# Altium PCB Nixie_Clock.PcbDoc
Units mil, origin at the board's own origin, x right, y up, seen from the top; angles counter-clockwise.
Board outline 1240.08 x 1320.08 mil, 4 copper layers (Top Layer, Layer 1, Layer 2, Bottom Layer), stack 61.811 mil thick; 34 components, 29 nets, 191 pads, 266 vias.
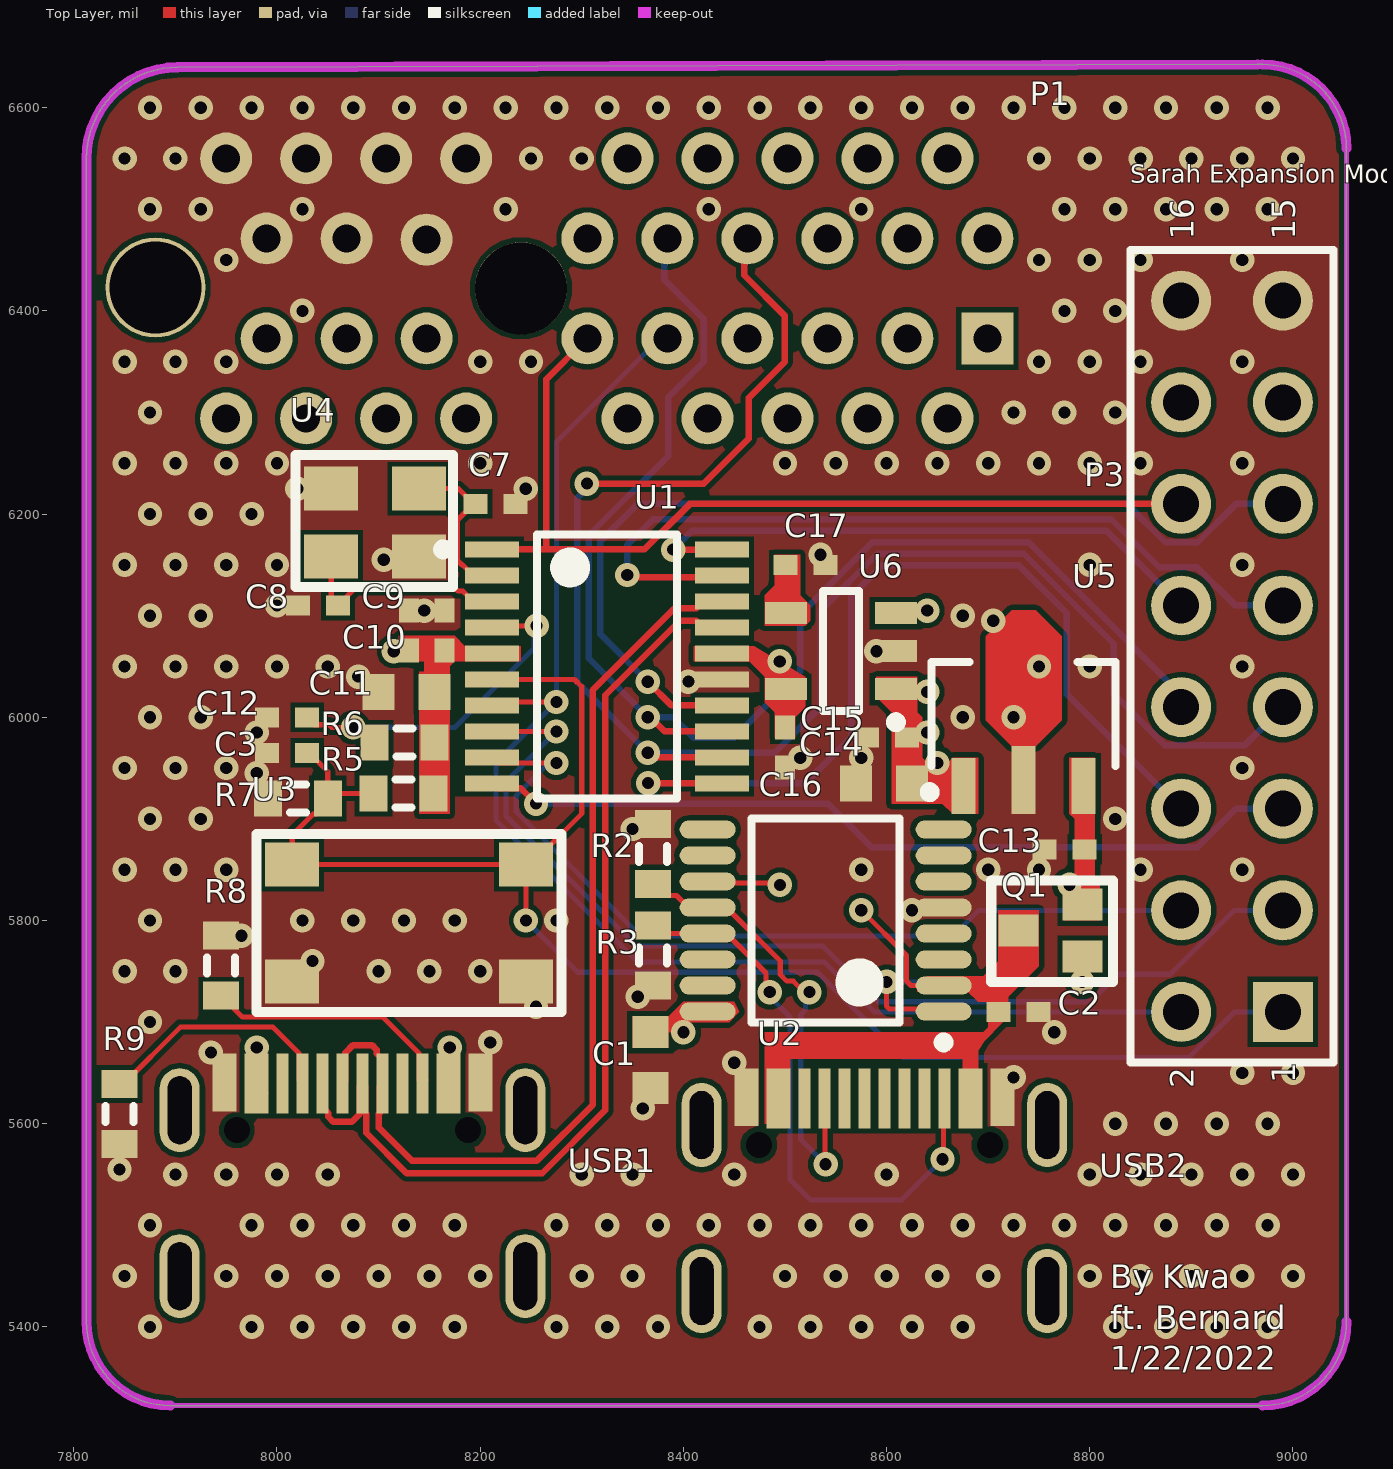
[diagram p0: Top Layer view]
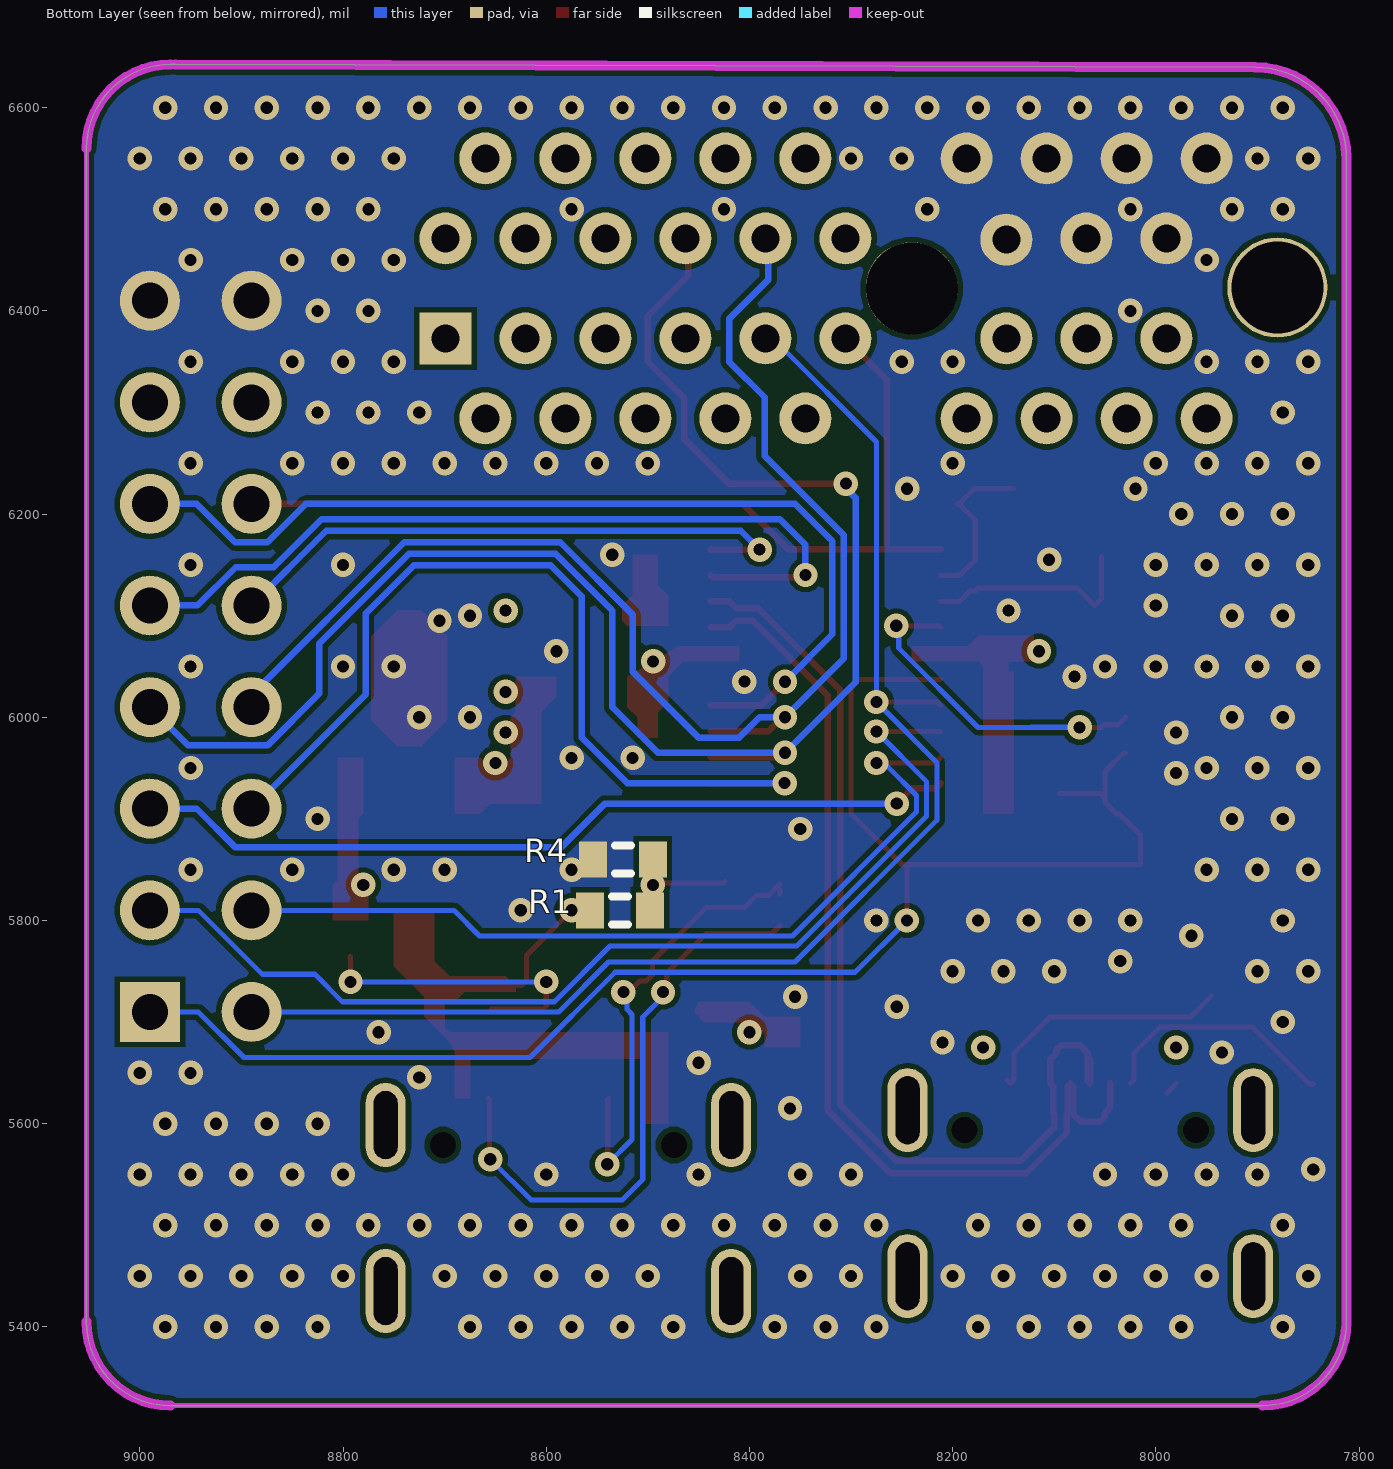
[diagram p1: Bottom Layer view, seen from below]
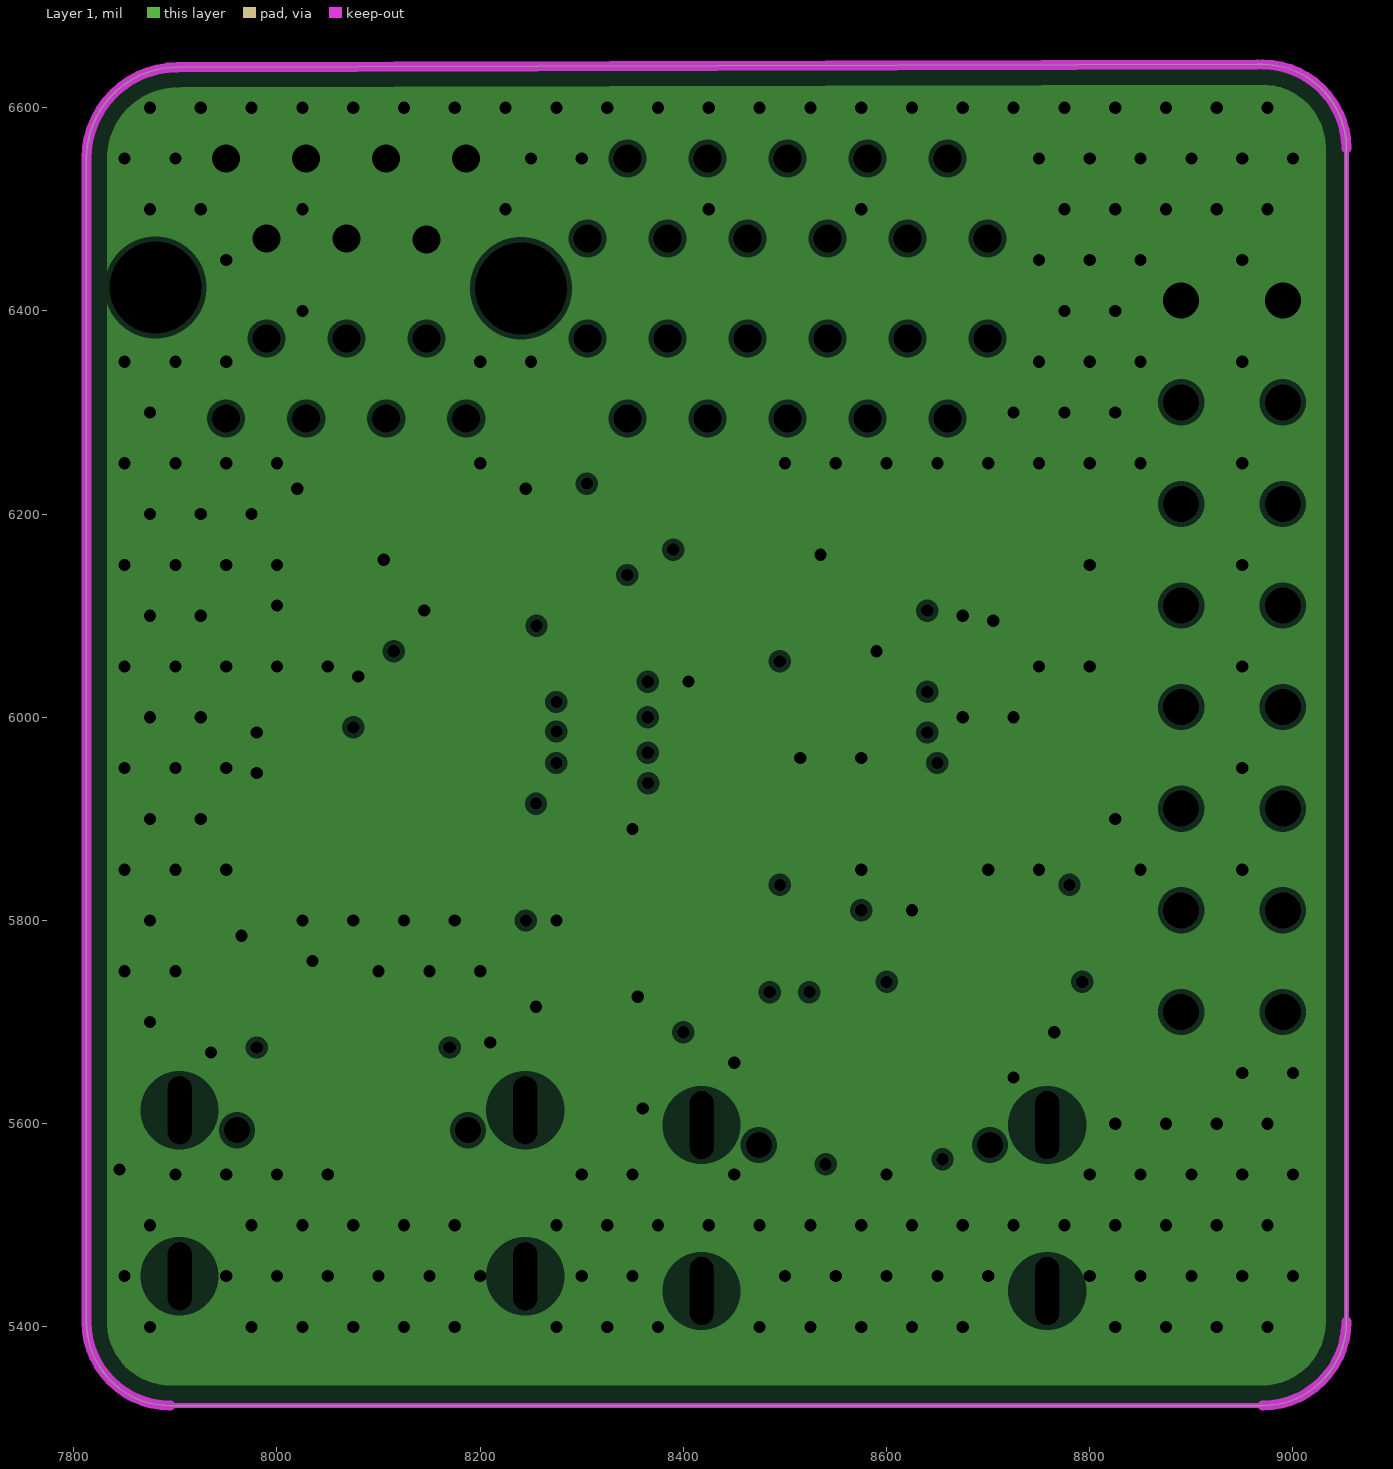
[diagram p2: Layer 1, clearances drawn from the general rule]
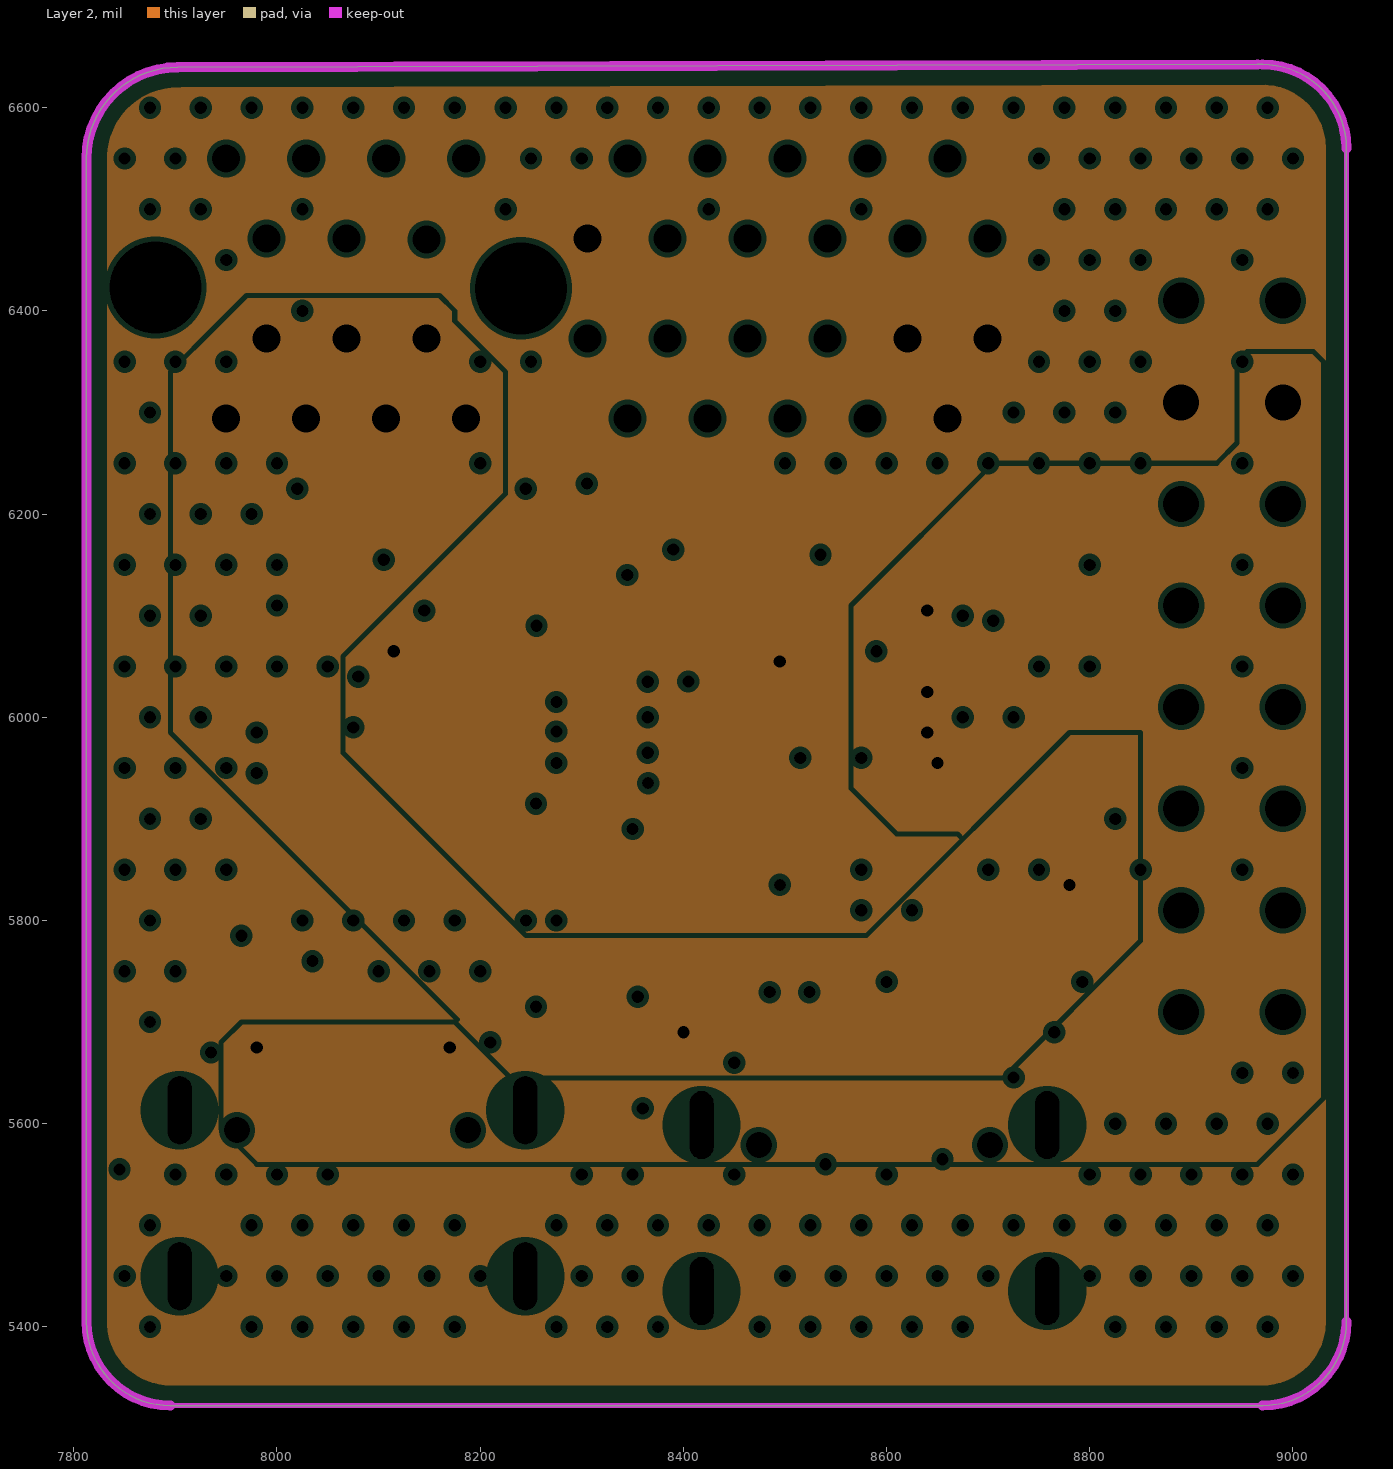
[diagram p3: Layer 2, clearances drawn from the general rule]

## Layer stack, top to bottom
Top Solder: solder mask 0.4, Solder Resist, Dk 3.5
Top Layer: signal copper 1.378
Dielectric 4: prepreg 3.937, PP-006, Dk 4.05
Layer 1: plane copper 0.689, net GND
Dielectric 1: dielectric 49.803, FR-4, Dk 4.8
Layer 2: plane copper 0.689, net 3V3
Dielectric 5: prepreg 3.937, PP-006, Dk 4.05
Bottom Layer: signal copper 1.378
Bottom Solder: solder mask 0.4, Solder Resist, Dk 3.5

## Board outline
7812.46,5405 ccw(c7895,5405) 7895,5322.46 8970,5322.46 ccw(c8970,5405) 9052.54,5405 9052.54,6560 ccw(c8970,6560) 8970,6642.54 8965,6642.54 7902.24,6639.78 ccw(c7902.24,6550) 7812.46,6550

## Design rules (kind name [scope] priority, off if disabled: settings)
Clearance [All] p1: gap=5 ignorepadtopadclearanceinfootprint=FALSE
DiffPairsRouting [All] p1: maxlimit=6 minlimit=6 mostfreqgap=6 toplayer_minwidth=6.4 toplayer_maxwidth=6.4 toplayer_prefwidth=6.4 bottomlayer_minwidth=6.4 bottomlayer_maxwidth=6.4 bottomlayer_prefwidth=6.4 impedanceprofiledriven=TRUE impedanceprofileid={5C14EBB6-B75E-43AF-993B-AA52860A555C} impedanceprofilevalue=90.000000 maxuncoupledlength=500
MinimumSolderMaskSliver [All] p1: minsoldermaskwidth=0
PlaneClearance [All] p1: clearance=5
PlaneConnect [All] p1: planeconnectstyle=Direct reliefexpansion=20 reliefentries=4 reliefconductorwidth=10 reliefairgap=10
PolygonConnect [All] p1: connectstyle=Direct reliefconductorwidth=10 reliefentries=4 polygonreliefangle="90 Angle" airgapwidth=10
RoutingVias [All] p1: holewidth=12 width=24 viastyle="Through Hole" minholewidth=12 minwidth=24 maxholewidth=28 maxwidth=50
SilkToSilkClearance [All] p1: silktosilkclearance=0
SilkToSolderMaskClearance [IsPad] p1: minsilkscreentomaskgap=0 clearancetoexposedcopper=TRUE
SolderMaskExpansion [All] p1: expansion=4 istentingtop=FALSE
Width [All] p1: maxlimit=100 minlimit=5 preferedwidth=5 minimp=50.000000 maximp=50.000000 favimp=50.000000
24 further rules are at their usual default settings.

## Classes and differential pairs
component class Power: C1 C2 C13 C14 C15 C16 C17 Q1 R1 R2 R3 R4 U2 U5 U6 USB2
component class STM32F103C4T6A: C3 C7 C8 C9 C10 C11 C12 P1 P3 R5 R6 R7 R8 R9 U1 U3 U4 USB1
differential pair USB1: +USB1_P -USB1_N

## Components (designator, comment, footprint, x,y, rotation, side; value= is the part's Value field where it differs from the comment)
C1 "Cap Semi" 1608[0603] 8367.5,5662.44 r90 top value=10uF
C2 "Cap Semi" 0402 8730,5710 r180 top value=1uF
C3 "Cap Semi" 0402 8010,5965 r0 top value=100nF
C7 "Cap Semi" 0402 8215.32,6210 r180 top value=10pF
C8 "Cap Semi" 0402 8040.31,6110 r180 top value=10pF
C9 "Cap Semi" 0402 8165,6085.31 r270 top value=100nF
C10 "Cap Semi" 0402 8130,6085.31 r270 top value=100nF
C11 "Cap Semi" 1608[0603] 8127.56,6025 r0 top value=10uF
C12 "Cap Semi" 0402 8010,6000 r0 top value=100nF
C13 "Cap Semi" 0402 8775.31,5870 r0 top value=1uF
C14 "Cap Semi" 1608[0603] 8597.44,5935 r0 top value=10uF
C15 "Cap Semi" 0402 8600.31,5980 r0 top value=1uF
C16 "Cap Semi" 0402 8500,5970.31 r90 top value=1uF
C17 "Cap Semi" 0402 8520.32,6150 r180 top value=10nF
P1 "PCI-e X1" 10018784-10210TLF 8203.31,6386.73 r180 top
P3 "Header 8X2" HDR2X8 8990,5710 r90 top
Q1 "MOSFET-N" BSS214NWH6327 8792.99,5764.41 r90 top
R1 "Res3" J1-0603 8527.38,5810 r0 bottom value=NC
R2 "Res3" J1-0603 8370,5865.47 r270 top value=5.1K
R3 "Res3" J1-0603 8370,5765.47 r90 top value=5.1K
R4 "Res3" J1-0603 8524.53,5860 r180 bottom value=NC
R5 "Res3" J1-0603 8124.53,5925 r0 top value=5k1
R6 "Res3" J1-0603 8125.47,5975 r0 top value=100k
R7 "Res3" J1-0603 8020.47,5920 r0 top
R8 "Res3" J1-0603 7945,5755.47 r270 top value=5k1
R9 "Res3" J1-0603 7845,5609.53 r90 top value=5k1
U1 "STM32F042F4P6" FP-TSSOP20-YA-MFG 8325,6050 r0 top
U2 "Injonic_IP2721" TSOP65P640X120-16N 8540,5800 r180 top
U3 "TSC015" TSC015 8100,5760 r0 top
U4 "S3232000121040" SMD3225 8053.39,6158.07 r0 top
U5 "UR133AG-50-AB3-B-R" SOT89-150P415X160-3N 8735,6005 r90 top
U6 "BROADCHIP BCT2019EUKV33-TR" SOT95P290X115-5N 8555,6065 r180 top
USB1 "USB C Receptacle_2.0" TYPE-C16PIN-CONNECTOR 8074.29,5531.53 r0 top
USB2 "USB C Receptacle_2.0" TYPE-C16PIN-CONNECTOR 8588.01,5516.93 r0 top

## Footprints (in the part's own frame and the unit in brackets; to place one, negate y for a bottom-side part, rotate by r counter-clockwise, add the part's x,y. Pads: shape width x height; smd on the part's side, far side on the other; paste and mask are expansions set on the pad)
0402 [mm] "Chip Capacitor, Body 1.0x0.5mm, IPC High Density"
  rect 0.6x0.5 smd: 1(-0.5,0) 2(0.5,0)
  body extent -0.55,-0.3 0.55,0.3, height 1.3
1608[0603] [mm] "Chip Capacitor, Body 1.6x0.8mm, IPC High Density"
  rect 0.8x0.9 smd: 1(-0.7,0) 2(0.7,0)
  body extent -0.87,-0.48 0.87,0.48, height 1.3
10018784-10210TLF [mm] "36 Position Female Connector PCI Express™ Gold 0.039\" (1.00mm) Black"
  rect 1.3x1.3 hole 0.7: A1(-12.595,0.353)
  round 1.3 hole 0.7: A2(-11.599,2.353) A3(-10.595,0.353) A4(-9.599,2.353) A5(-8.595,0.353) A6(-7.599,2.353) A7(-6.595,0.353) A8(-5.599,2.353) A9(-4.595,0.353) A10(-3.599,2.353) A11(-2.595,0.353) A12(0.434,2.353) A13(1.425,0.353) A14(2.434,2.353) A15(3.425,0.353) A16(4.434,2.353) A17(5.425,0.353) A18(6.434,2.353) B1(-12.595,-2.147) B2(-11.599,-4.147) B3(-10.595,-2.147) B4(-9.599,-4.147) B5(-8.595,-2.147) B6(-7.599,-4.147) B7(-6.595,-2.147) B8(-5.599,-4.147) B9(-4.595,-2.147) B10(-3.599,-4.147) B11(-2.595,-2.147) B12(0.434,-4.147) B13(1.425,-2.118) B14(2.434,-4.147) B15(3.425,-2.147) B16(4.434,-4.147) B17(5.425,-2.147) B18(6.434,-4.147)
  round 2.3 hole 2.3: ""(-0.938,-0.902)
  round 2.5 hole 2.3: ""(8.201,-0.921)
  body extent -15.58,-6 9.42,2.8, height 11
BSS214NWH6327 [mm]
  rect 0.8x1 smd: 1(0,0) 2(1.3,0) 3(0.65,1.6)
  silkscreen extent -0.64,-0.76 1.91,2.29
FP-TSSOP20-YA-MFG [mm]
  rect 1.35x0.4 smd paste+0 mask+0: 1(-2.875,2.925) 2(-2.875,2.275) 3(-2.875,1.625) 4(-2.875,0.975) 5(-2.875,0.325) 6(-2.875,-0.325) 7(-2.875,-0.975) 8(-2.875,-1.625) 9(-2.875,-2.275) 10(-2.875,-2.925) 11(2.875,-2.925) 12(2.875,-2.275) 13(2.875,-1.625) 14(2.875,-0.975) 15(2.875,-0.325) 16(2.875,0.325) 17(2.875,0.975) 18(2.875,1.625) 19(2.875,2.275) 20(2.875,2.925)
  silkscreen extent -4.22,-3.3 1.75,3.3, body extent -3.65,-3.55 3.65,3.55, height 0.25
HDR2X8 [mm] "Connector; Header; 8x2 Position"
  rect 1.5x1.5 hole 0.9: 1(0,0)
  round 1.5 hole 0.9: 2(0,2.54) 3(2.54,0) 4(2.54,2.54) 5(5.08,0) 6(5.08,2.54) 7(7.62,0) 8(7.62,2.54) 9(10.16,0) 10(10.16,2.54) 11(12.7,0) 12(12.7,2.54) 13(15.24,0) 14(15.24,2.54) 15(17.78,0) 16(17.78,2.54)
  silkscreen extent -1.27,-1.27 19.05,3.81
J1-0603 [mm] "Chip Resistor, Body 1.6x0.8mm, IPC High Density"
  rect 0.7x0.9 smd: 1(-0.75,0) 2(0.75,0)
  silkscreen extent -0.2,-0.35 0.2,0.35, body extent -0.85,-0.48 0.85,0.48, height 0.9
SMD3225 [mm] "32 MHz SMD Crystal Resonator"
  rect 1.35x1.1 smd: 1(0,0) 2(2.2,0) 3(2.2,1.7) 4(0,1.7)
  silkscreen extent -0.89,-0.76 3.05,2.54, body extent -0.46,-0.36 2.74,2.14, height 0.81
SOT89-150P415X160-3N [mm] "SOT89, 3-Leads, Body 4.50x2.45mm, Pitch 1.50mm, Lead Span 4.2mm, IPC Medium Density"
  rect 1.4x0.6 smd: 1(-1.85,1.5) 3(-1.85,-1.5)
  rect 1.7x0.6 smd: 2(-1.7,0)
  Top Layer region: -0.85,0.3 -0.2,0.95 1.9,0.95 2.55,0.3 2.55,-0.3 1.9,-0.95 -0.2,-0.95 -0.85,-0.3
  silkscreen extent -2.12,-2.3 1.25,2.47, body extent -2.2,-2.3 1.99,2.3, height 1.6
SOT95P290X115-5N [mm] "SOT23, 5-Leads, Body 2.92x2.90mm, Pitch 0.95mm, IPC Medium Density"
  rect 1.05x0.55 smd: 1(-1.375,0.95) 2(-1.375,0) 3(-1.375,-0.95) 4(1.375,-0.95) 5(1.375,0.95)
  silkscreen extent -1.5,-1.5 0.45,1.9, body extent -1.53,-1.51 1.53,1.51, height 1.15
TSC015 [mil] "Tactile Switch"
  rect 53.15x43.31 smd: 1(-85,95) 1(145,95) 2(-85,-20) 2(145,-20)
  silkscreen extent -120,-50 180,125
TSOP65P640X120-16N [mm] "TSOP, 16-Leads, Body 4.96x4.40mm, Pitch 0.65mm, IPC Medium Density"
  oval 1.4x0.45 smd: 1(-2.95,2.275) 2(-2.95,1.625) 3(-2.95,0.975) 4(-2.95,0.325) 5(-2.95,-0.325) 6(-2.95,-0.975) 7(-2.95,-1.625) 8(-2.95,-2.275) 9(2.95,-2.275) 10(2.95,-1.625) 11(2.95,-0.975) 12(2.95,-0.325) 13(2.95,0.325) 14(2.95,0.975) 15(2.95,1.625) 16(2.95,2.275)
  silkscreen extent -3.08,-2.55 1.85,3.17, body extent -3.2,-2.55 3.2,2.55, height 1.2
TYPE-C16PIN-CONNECTOR [mm]
  rect 0.6x1.449 smd paste+0: A1-B12(-3.2,2.77) B1-A12(3.2,2.77)
  rect 0.6x1.5 smd paste+0: A4-B9(-2.4,2.745) B4-A9(2.4,2.745)
  rect 0.3x1.5 smd paste+0: A5(-1.25,2.745) A6(-0.25,2.745) A7(0.25,2.745) A8(-1.75,2.745) B5(1.75,2.745) B6(0.75,2.745) B7(-0.75,2.745) B8(1.25,2.745)
  oval 1x2.1 hole 0.6 slot 1.7 at 90 deg paste+0: MH(-4.32,-2.075) MH(-4.32,2.075) MH(4.32,-2.075) MH(4.32,2.075)
  rect 0x0 hole 0.65 paste+0: MH(-2.89,1.575) MH(2.89,1.575)
  body extent -6.1,-65.71 6.1,2.98, height 4.7

## Part data
C1 C2 C3 C7 C8 C9 C10 C11 C12 C13 C14 C15 C16 C17: "Capacitor (Semiconductor SIM Model)", LatestRevisionDate=29-May-2009, LatestRevisionNote="IPC-7351 Footprint Added.", PackageDescription="Chip Capacitor", PackageReference=C1206, Published=8-Jun-2000, Publisher="Altium Limited"
  C11: Supplier 1=Digi-Key
P3: "Header, 8-Pin, Dual row", LatestRevisionDate=17-Jul-2002, LatestRevisionNote="Re-released for DXP Platform.", Publisher="Altium Limited"
Q1: "N-Channel MOSFET", LatestRevisionDate=17-Jul-2002, LatestRevisionNote="Re-released for DXP Platform.", PackageDescription="TO, Flat Index; 3 In-Line, Axial Leads; Body Dia. 4.6mm; Lead Dia. 0.5 mm (max)", PackageReference=E3, PackageVersion=1995/1996, Published=8-Jun-2000, Publisher="Altium Limited"
R1 R2 R3 R4 R5 R6 R8 R9: "Resistor", LatestRevisionDate=29-May-2009, LatestRevisionNote="IPC-7351 Footprint Added.", PackageDescription="Chip Resistor", PackageReference=J1-0603, Published=8-Jun-2000, Publisher="Altium Limited"
R7: library part CMP-2000-07406-1, "Photoconductive Resistor, 200 kOhm, 100 V, 80 mW, -40 to 75 degC, 2-Pin THD, RoHS", Dark Resistance=200kohm, Manufacturer="Excelitas Technology", Operating Temperature Max=75°C, Operating Temperature Min=-40°C, Package Description="2-Pin Through Hole Device, Body Width 4.17 mm (Max), Height 2.29 mm", Package Reference=VT90N1, Power Rating=80mW, Resistance @ Lux=12kohm, Resistor Case Style=-, Voltage Rating=100V, Datasheet URL=http://datasheet.octopart.com/VT90N1-Excelitas-datasheet-10388451.pdf, Datasheet Version=09/2006, Manufacturer URL=http://www.excelitas.com/Pages/Index.aspx, Mounting Technology=ThroughHole, Packaging=Each, Product Range=-, SVHC=Cadmiumchloride(15-Jun-2015)
U1: library part CMP-0304-00106-3, "IC MCU 32BIT 16KB FLASH 20TSSOP", Ambient Temperature Range High=+85°C, Ambient Temperature Range Low=-40°C, Frequency=48MHz, Manufacturer=STMicroelectronics, Max Junction Temp=+105°C, Max Supply Voltage=3.6V, Min Supply Voltage=2V, Nominal Supply Current=0.4-20.5mA, Package=TSSOP20-YA, Temperature="-40°C to +85°C", Automotive=No, Category=IC, ComponentLink2Description=Datasheet, ComponentLink2URL=https://www.st.com/resource/en/datasheet/stm32f042f4.pdf, Core Architecture="ARM Cortex-M0", Data Bus Width=32bits, Device Class L1="Integrated Circuits (ICs)", Device Class L2="Embedded Processors and Controllers", Device Class L3=Microcontrollers, Digikey Description="IC MCU 32BIT 16KB FLASH 20TSSOP", Height=1.2mm, Interface=I2C,SPI,UART,USART,CAN,USB,I2S,Other, Ipc Land Pattern Name=SOP65P640X120-20, Lead Free=Yes, Manufacturer Part Number=STM32F042F4P6, Memory Size=16KBytes, Memory Type=FLASH, Mouser Description="MCU 32-Bit STM32F ARM Cortex M0 RISC 16KB Flash 2.5V/3.3V 20-Pin TSSOP Tube", Number Of A/D Converters=1, Number Of Adc Channels=12, Number Of Cores=1, Number Of I2C Channels=1, Number Of I/Os=16, Number Of Pwm Channels=6, Number Of Spi Channels=1, Number Of Timers/Counters=6, Number Of Uart Channels=2, Number Of Usb Channels=1, Octopart=https://octopart.com/stm32f042f4p6-stmicroelectronics-34084829, Ram Size=6KBytes, RoHS=TRUE, Standoff Height=0.05mm, Temperature Range High=+85°C, Temperature Range Low=-40°C
U2: library part Injonic_P2721, "USB-C Controller"
U3: "Tactile Switch"
U4: "32MHz SMD Crystal Resonator"
U5: library part "UR133AG-50-AB3-B-R SOT-89", "12V-5V Voltage Regulator"
U6: library part BCT2019EUKV33-TR, "5V-3.3V Voltage Regulator"

## Via types
v1: diameter 24, hole 12, Top Layer to Bottom Layer, tented both sides, 205 vias
v2: diameter 24, hole 12, Top Layer to Bottom Layer, 61 vias

## Nets (pads, with @x,y where several pads share a name; then routed paths per layer and width w, separated by ;. In a path a pad name is that pad's centre, name@x,y a point inside that pad or via, vN(x,y) a via of type N, cw(c..) or ccw(c..) an arc to the next point about the centre after c; other vN are vias at no path point)
3V3: C9.2 C10.2 C11.2 C16.2 P1.A1 P1.A2 P1.A3 P1.B11 P3.14 R5.2 R6.2 U1.5 U1.16 U6.5
  other v2: 8494.8,6055 8115,6065
5V: C14.2 C15.2 P3.13 U5.1 U6.1 U6.3 USB1.A4-B9 USB1.B4-A9 | length 13.2
  Top Layer w5: USB1.A4-B9 USB1.A4-B9@7989.11,5630.29
  other v2: 7980,5675 8170,5675 8650,5955 8640,5985 8640,6025 8640,6105
12V: C1.2 C13.2 P1.A12 P1.A13 P1.A14 P1.A15 P1.A16 P1.A17 P1.A18 Q1.2 U2.16 U5.3
  other v2: 8400,5690 8780,5835
ADC: C3.2 P3.1 R5.1 R7.2 U1.6 U3.1 | length 1579.3
  Top Layer w5: C3.2 8031.65,5965 8050,5946.65 R7.2 ; R5.1 8055,5925 R7.2 ; U1.6 8292.8,6037.2 8300,6030 8300,5905.08 8249.92,5855 U3.1@8245,5855 ; v2(8245,5800) U3.1@8245,5855 ; R7.2 8050,5916.06 8038.72,5904.78 8035.63,5904.78 8015,5884.15 8015,5855 U3.1@8245,5855
  Bottom Layer w5: v2(8245,5800) 8296,5749 8532.08,5749 8616.08,5665 8897.36,5665 8942.36,5710 P3.1
CC1: R2.2 U2.12 USB2.A5 | length 458.5
  Top Layer w5: R2.2@8370,5826.06 R2.2@8370,5830 ; R2.2 8381.28,5824.67 8393.29,5824.67 8405.16,5812.8 U2.12 8442.56,5812.8 8495.35,5760 8495.35,5746.72 8501.87,5740.21 8508.15,5740.21 8518.86,5729.5 v2(8524,5729.5) ; USB2.A5 8539.4,5624.4 8539.4,5560.6 v2(8540,5560)
  Bottom Layer w5: v2(8524,5729.5) 8520.36,5725.86 8520.36,5712.36 8515.5,5707.5 8515.5,5584.5 v2(8540,5560)
CC2: R3.2 U2.13 USB2.B5 | length 579.5
  Top Layer w5: R3.2 8377.8,5787.2 U2.13 8442.56,5787.2 8481.36,5748.4 8481.36,5733.14 v2(8485,5729.5) ; v2(8655,5565) 8655.95,5565.95 8655.95,5624.05 USB2.B5
  Bottom Layer w5: v2(8485,5729.5) 8485,5725 8505,5705 8505,5545 8525,5525 8615,5525 v2(8655,5565)
DOT_PWM: P1.B9 P3.8 U1.13 | length 1354.3
  Top Layer w6.4: v2(8365,6000) 8367.59,6000 8381.56,5986.02 U1.13
  Bottom Layer w6.4: P1.B9@8381.26,6468.43 8381.26,6430.84 8420,6392.1 8420,6350 8385,6315 8385,6257.08 8306.97,6179.05 8306.97,6058.03 v2(8365,6000) 8390,6000 8410,5980 8450,5980 8515,6045 8515,6101.12 8586.09,6172.21 8739.78,6172.21 8890,6021.98 P3.8
GND: C1.1 C2.1 C3.1 C7.1 C8.2 C9.1 C10.1 C11.1 C12.1 C13.1 C14.1 C15.1 C16.1 C17.1 P1.B12 P1.B13 P1.B14 P1.B15 P1.B16 P1.B17 P1.B18 P3.15 P3.16 R2.1 R3.1 R4.1 R7.1 R8.1 R9.1 U1.15 U2.5 U3.2 U4.2 U4.4 U5.2 U6.2 USB1.A1-B12 USB1.B1-A12 USB2.A1-B12 USB2.B1-A12
  other v1: 7875,5400 7975,5400 8025,5400 8075,5400 8125,5400 8175,5400 8275,5400 8325,5400 8375,5400 8475,5400 8525,5400 8575,5400 8625,5400 8675,5400 8825,5400 8875,5400 8925,5400 8975,5400 7850,5450 7950,5450 8000,5450 8050,5450 8100,5450 8150,5450 8200,5450 8300,5450 8350,5450 8500,5450 8550,5450 8600,5450 8650,5450 8700,5450 8800,5450 8850,5450 8900,5450 8950,5450 9000,5450 7875,5500 7975,5500 8025,5500 8075,5500 8125,5500 8175,5500 8275,5500 8325,5500 8375,5500 8425,5500 8475,5500 8525,5500 8575,5500 8625,5500 8675,5500 8725,5500 8775,5500 8825,5500 8875,5500 8925,5500 8975,5500 7900,5550 7950,5550 8000,5550 8050,5550 8300,5550 8350,5550 8450,5550 8600,5550 8800,5550 8850,5550 8900,5550 8950,5550 9000,5550 8825,5600 8875,5600 8925,5600 8975,5600 8950,5650 9000,5650 7875,5700 7850,5750 7900,5750 8100,5750 8150,5750 8200,5750 7875,5800 8025,5800 8075,5800 8125,5800 8175,5800 8275,5800 7850,5850 7900,5850 7950,5850 8700,5850 8850,5850 8950,5850 7875,5900 7925,5900 8825,5900 7850,5950 7900,5950 7950,5950 8950,5950 7875,6000 7925,6000 8675,6000 8725,6000 7850,6050 7900,6050 7950,6050 8000,6050 8050,6050 8750,6050 8800,6050 8950,6050 7875,6100 7925,6100 8675,6100 7850,6150 7900,6150 7950,6150 8000,6150 8800,6150 8950,6150 7875,6200 7925,6200 7975,6200 7850,6250 7900,6250 7950,6250 8000,6250 8200,6250 8500,6250 8550,6250 8600,6250 8650,6250 8700,6250 8750,6250 8800,6250 8850,6250 8950,6250 7875,6300 8725,6300 8775,6300 8825,6300 7850,6350 7900,6350 7950,6350 8200,6350 8250,6350 8750,6350 8800,6350 8850,6350 8950,6350 8025,6400 8775,6400 8825,6400 7950,6450 8750,6450 8800,6450 8850,6450 8950,6450 7875,6500 7925,6500 8025,6500 8225,6500 8425,6500 8575,6500 8775,6500 8825,6500 8875,6500 8925,6500 8975,6500 7850,6550 7900,6550 8250,6550 8300,6550 8750,6550 8800,6550 8850,6550 8900,6550 8950,6550 9000,6550 7875,6600 7925,6600 7975,6600 8025,6600 8075,6600 8125,6600 8175,6600 8225,6600 8275,6600 8325,6600 8375,6600 8425,6600 8475,6600 8525,6600 8575,6600 8625,6600 8675,6600 8725,6600 8775,6600 8825,6600 8875,6600 8925,6600 8975,6600
  other v2: 7845,5555 8360,5615 8725,5645.5 8450,5660 7935,5670 8210,5680 8765,5690 8255,5715 8355,5725 8035,5760 7965,5785 8625,5810 8575,5850 8750,5850 8350,5890 7980,5945 8515,5960 8575,5960 7980,5985 8404.95,6035.13 8080,6040 8590,6065 8705,6095 8145,6105 8000,6110 8105,6155 8535,6160 8020,6225 8244.8,6225
HV5222_PWM: P1.B7 P3.7 U1.12 | length 1660.2
  Top Layer w6.4: v2(8305,6230) 8420,6230 8464.29,6274.29 8464.29,6314.29 8500,6350 8500,6395 8460,6435 P1.B7@8460,6468.43 ; v2(8365,5965) 8369.57,5960.43 U1.12
  Bottom Layer w6.4: v2(8305,6230) 8305,6225.24 8295.57,6215.81 8295.57,6034.43 v2(8365,5965) 8490,5965 8535,6010 8535,6105 8590.81,6160.81 8735.06,6160.81 8823.59,6072.27 8823.59,6023.05 8874.37,5972.27 8952.27,5972.27 P3.7
LED_CLK: P3.11 U1.14 | length 958.6
  Top Layer w6.4: v2(8365,6035) 8388.39,6011.61 U1.14
  Bottom Layer w6.4: v2(8365,6035) 8318.37,6081.63 8318.37,6173.37 8355,6210 8836.65,6210 8874.37,6172.27 8906.2,6172.27 8943.92,6210 P3.11
LED_MOSI: P3.6 U1.11 | length 913.6
  Top Layer w6.4: v2(8365.33,5935.2) 8365.69,5934.84 U1.11
  Bottom Layer w6.4: v2(8365.33,5935.2) 8520.2,5935.2 8565,5980 8565,6118.88 8595.53,6149.41 8730.34,6149.41 8777.48,6102.27 8777.48,6022.52 P3.6
NetC17_2: C17.2 U6.4
NetR1_1: R1.1 R4.2 U2.11 | length 72.5
  Top Layer w5: U2.11 8425.55,5836.69 8493.31,5836.69 v2(8495,5835)
NetR8_2: R8.2 USB1.B5 | length 254.2
  Top Layer w5: R8.2 7965.94,5705 8104.14,5705 8139.78,5669.36 8139.78,5643.01 USB1.B5 USB1.B5@8146.59,5643.01
NetR9_2: R9.2 USB1.A5 | length 241.6
  Top Layer w5: R9.2 7848.94,5639.06 7904.88,5695 7996.03,5695 8021.67,5669.36 8021.67,5643.01 USB1.A5
Nixie_MOSI: P1.A9 P3.2 U1.7 | length 1361.5
  Top Layer w5: U1.7 8215.2,6015 v2(8275,6015)
  Bottom Layer w5: P1.A9@8381.26,6370 8373.99,6370 8275,6271.01 v2(8275,6015) 8215.5,5955.5 8215.5,5898.64 8355.14,5759 8538.78,5759 8587.78,5710 P3.2
Nixie_SCK: P1.A11 P3.12 U1.1 | length 917.1
  Top Layer w6.4: U1.1 8265,6165.16 ; P1.A11@8302.52,6370 8265,6332.48 8265,6165.16 ; P3.12 8406.44,6210 8361.59,6165.16 8265,6165.16
NRST: C12.2 R6.1 U1.4 | length 327.3
  Top Layer w5: C12.2 8037.03,5992.66 8051.28,5992.66 8053.94,5990 v2(8075,5990) ; U1.4 8213.43,6090 v2(8255.5,6090)
  Bottom Layer w5: v2(8075,5990) 8075.14,5990.14 8122.86,5990.14 8123,5990.28 ; 8123,5990 8175,5990 8253,6068 8253,6087.5 v2(8255.5,6090)
OSCIN: C7.2 U1.2 U4.3 | length 164.4
  Top Layer w5: U4.3 8178.66,6225 C7.2@8193.66,6210 ; C7.2 C7.2@8193.66,6210 ; U1.2 8193.11,6139.57 8182.89,6149.78 8182.13,6149.78 8177.74,6154.18 8177.74,6194.07 C7.2@8193.66,6210
OSCOUT: C8.1 U1.3 U4.1 | length 215.3
  Top Layer w5: U4.1 8053.39,6116.61 C8.1 8077.34,6127.34 8174.92,6127.34 8178.07,6124.19 8182.89,6124.19 8193.11,6113.98 U1.3
Piezo_PWM: P3.5 U1.10 | length 819.7
  Top Layer w6.4: U1.10 8216.49,5930.17 8239.83,5930.17 v2(8255,5915)
  Bottom Layer w6.4: v2(8255,5915) 8542.15,5915 8584.87,5872.27 8906.2,5872.27 8943.92,5910 P3.5
SWCLK: P3.10 U1.20 | length 586.4
  Top Layer w6.4: v2(8390,6165) 8390.08,6165.08 8438.11,6165.08 U1.20
  Bottom Layer w6.4: v2(8390,6165) 8408.6,6183.6 8816.4,6183.6 P3.10
SWIO: P3.9 U1.19 | length 815.5
  Top Layer w6.4: v2(8344.8,6140) 8346.78,6138.02 8436.64,6138.02 U1.19
  Bottom Layer w6.4: v2(8344.8,6140) 8345,6140.2 8345,6170 8370,6195 8821.12,6195 8868.39,6147.73 8905.63,6147.73 8943.35,6110 P3.9
USART_RX: P3.4 U1.9 | length 849.9
  Top Layer w5: U1.9 8217.18,5955.06 8274.94,5955.06 v2(8275,5955)
  Bottom Layer w5: v2(8275,5955) 8271.36,5951.36 8263.79,5951.36 8235.5,5923.08 8235.5,5906.92 8357.64,5784.78 8665.56,5784.78 8690.78,5810 P3.4
USART_TX: P3.3 U1.8 | length 1044.4
  Top Layer w5: U1.8 v2(8275,5986)
  Bottom Layer w5: v2(8275,5986) 8225.5,5936.5 8225.5,5902.78 8353.5,5774.78 8537.14,5774.78 8591.92,5720 8800.66,5720 8827.69,5747.03 8879.39,5747.03 8942.36,5810 P3.3
USB1_N: U1.17 USB1.A7 USB1.B7 | length 986.7
  Top Layer w6.4: USB1.B7 8044.76,5615.98 8050.34,5610.4 8050.34,5606.68 8055.14,5601.87 8073.75,5601.87 8081.42,5609.55 8081.42,5636.89 USB1.A7 8086.84,5636.89 8086.84,5610.46 8087.77,5609.52 8087.77,5591.08 8127.57,5551.29 8261.05,5551.29 8323.1,5613.33 8323.1,6021.66 8396.42,6094.98 8412.89,6094.98 8419.49,6088.39 U1.17
USB1_P: U1.18 USB1.A6 USB1.B6 | length 989.8
  Top Layer w6.4: USB1.A6@8064.45,5663.22 USB1.A6 8067.15,5642.31 8067.15,5669.65 8074.83,5677.33 8093.43,5677.33 8098.23,5672.52 8098.23,5668.8 8103.82,5663.22 USB1.B6 8101.11,5636.89 8101.11,5610.46 8100.17,5609.52 8100.17,5596.22 8132.7,5563.68 8255.92,5563.68 8310.7,5618.47 8310.7,6026.8 8391.28,6107.38 8412.89,6107.38 8419.49,6113.98 U1.18
VBUS: C2.2 Q1.3 R1.2 U2.2 USB2.A4-B9 USB2.B4-A9 | length 126.4
  Top Layer w5: v2(8575,5810) 8619.5,5765.5 8619.5,5740.5 8623.98,5736.02 U2.2
VBUS_GATE: Q1.1 U2.1 | length 299.8
  Top Layer w5: v2(8600,5739.5) 8600,5715.65 8602.93,5712.72 8653.86,5712.72 U2.1 ; v2(8792.58,5739.5) 8792.58,5764 Q1.1
  Bottom Layer w5: v2(8600,5739.5) v2(8792.58,5739.5)
pads on no net: P1. P1.A4 P1.A5 P1.A6 P1.A7 P1.A8 P1.A10 P1.B1 P1.B2 P1.B3 P1.B4 P1.B5 P1.B6 P1.B8 P1.B10 U2.3 U2.4 U2.6 U2.7 U2.8 U2.9 U2.10 U2.14 U2.15 USB1.A8 USB1.B8 USB1.MH USB2.A6 USB2.A7 USB2.A8 USB2.B6 USB2.B7 USB2.B8 USB2.MH

## Polygon pours and split planes (outlines as drawn)
GND on Top Layer "GND_L01_P002" (solid, remove dead copper, pour order 2): 7812.16,6633.24 7812.16,5298.24 9087.16,5298.24 9087.16,6633.24
no net on Top Layer "NONET_L01_P000" (solid, pour order 0): 4660,2880 4690,2850 4690,1685 6970,1685 7015,1640 7035,1660 7035,2890 4650,2890 4640,2880
GND on Bottom Layer "GND_L04_P001" (solid, remove dead copper, pour order 1): 7815,6635 7815,5300 9090,5300 9090,6635
12V on Layer 2 (split plane): 8172.45,6398.94 8172.45,6390 8172.65,6389.02 8173.2,6388.2 8198.2,6363.2 8222.45,6338.94 8222.45,6221.06 8161.95,6160.55 8063.2,6061.8 8062.65,6060.98 8062.45,6060 8062.45,5965 8062.65,5964.02 8063.2,5963.2 8098.2,5928.2 8243.2,5783.2 8244.02,5782.65 8245,5782.45 8580,5782.45 8580.98,5782.65 8581.8,5783.2 8771.8,5973.2 8781.06,5982.45 8847.45,5982.45 8847.45,5781.06 8713.94,5647.55 8231.06,5647.55 8178.46,5700.14 8178.48,5700.15 8179.3,5700.7 8179.85,5701.52 8180.05,5702.5 8179.85,5703.48 8179.3,5704.3 7897.55,5986.06 7897.55,6338.94 7941.8,6383.2 7971.06,6412.45 8158.94,6412.45
5V on Layer 2 (split plane): 9027.45,6348.94 9027.45,6230 9027.45,5626.06 8963.94,5562.55 7981.06,5562.55 7947.55,5596.06 7947.55,5678.94 7966.06,5697.45 8173.94,5697.45 8228.2,5643.2 8229.02,5642.65 8230,5642.45 8715,5642.45 8715.98,5642.65 8716.8,5643.2 8851.8,5778.2 8852.35,5779.02 8852.55,5780 8852.55,5985 8852.35,5985.98 8851.8,5986.8 8850.98,5987.35 8850,5987.55 8780,5987.55 8779.02,5987.35 8778.2,5986.8 8768.2,5976.8 8683.2,5891.8 8675,5883.6 8671.8,5886.8 8670.98,5887.35 8670,5887.55 8611.06,5887.55 8567.55,5931.06 8567.55,6108.94 8706.06,6247.45 8925,6247.45 8925.98,6247.65 8926.8,6248.2 8946.8,6268.2 8947.35,6269.02 8947.55,6270 8947.55,6348.94 8956.06,6357.45 9018.94,6357.45
3V3 on Layer 2 (split plane): 152 vertices, not listed, extent 7832.5,5342.5 9032.5,6622.5
GND on Layer 1 (split plane): 8977,6622.14 8983.92,6620.97 8990.65,6619.03 8997.13,6616.34 9003.27,6612.95 9008.99,6608.89 9014.22,6604.22 9018.89,6598.99 9022.95,6593.27 9026.34,6587.13 9029.03,6580.65 9030.97,6573.92 9032.14,6567 9032.5,6560.62 9032.44,6560 9032.44,5405 9032.5,5404.38 9032.14,5398 9030.97,5391.08 9029.03,5384.35 9026.34,5377.87 9022.95,5371.73 9018.89,5366.01 9014.22,5360.78 9008.99,5356.11 9003.27,5352.05 8997.13,5348.66 8990.65,5345.97 8983.92,5344.03 8977,5342.86 8970.62,5342.5 8970,5342.56 7895,5342.56 7894.38,5342.5 7888,5342.86 7881.08,5344.03 7874.35,5345.97 7867.87,5348.66 7861.73,5352.05 7856.01,5356.11 7850.78,5360.78 7846.11,5366.01 7842.05,5371.73 7838.66,5377.87 7835.97,5384.35 7834.03,5391.08 7832.86,5398 7832.5,5404.38 7832.56,5405 7832.56,6550 7832.51,6550.55 7832.81,6556.84 7833.82,6563.61 7835.48,6570.25 7837.79,6576.7 7840.72,6582.89 7844.23,6588.76 7848.31,6594.26 7852.91,6599.33 7857.98,6603.93 7863.48,6608 7869.35,6611.52 7875.54,6614.45 7881.99,6616.76 7888.63,6618.42 7895.4,6619.43 7901.72,6619.74 7902.24,6619.69 7902.24,6619.68 7902.27,6619.68 7902.29,6619.68 8965.01,6622.44 8970,6622.44 8970.62,6622.5

## Keep-outs
Keep-Out Layer:
  lines w5: 7895,5322.46 8970,5322.46 ; 9052.54,5405 9052.54,6560
  lines w10: 7895,5322.46 cw(c7895,5405) 7812.46,5405 7812.46,6550 cw(c7902.24,6550) 7902.24,6639.78 8965,6642.54 ; 8970,5322.46 ccw(c8970,5405) 9052.54,5405 ; 8970,6642.54 cw(c8970,6560) 9052.54,6560

## Other copper
Top Layer:
  region net 12V: 8450,5720 8400,5720 8385,5705 8350,5705 8350,5675 8385,5675 8385,5690 8390,5690 8400,5700 8445,5700 8455,5710
  region net 3V3: 8155,6080 8120,6080 8120,6055 8155,6055
  region net 3V3: 8240,6070 8185,6070 8175,6080 8155,6080 8145,6055 8145,6045 8140,6045 8140,5905 8170,5905 8170,6050 8175,6055 8240,6055
  region net NetC17_2: 8520,6090 8480,6090 8480,6120 8490,6130 8490,6160 8515,6160 8515,6120 8525,6110 8525,6095
  region net 3V3: 8520,6010 8510,6000 8510,5980 8490,5980 8490,6005 8480,6015 8480,6040 8465,6055 8410,6055 8410,6070 8470,6070 8520,6040 8520,6020
  region net 5V: 8605,5995 8605,6005 8590,6020 8590,6040 8630,6040 8630,6005 8635,6000 8635,5995
  region net 5V: 8690,5905 8665,5905 8655,5915 8605,5915 8605,5995 8635,5995 8635,5960 8650,5945 8665,5960 8690,5960
  region net 12V: 8775,5800 8775,5830 8785,5840 8785,5900 8780,5905 8780,5960 8805,5960 8805,5840 8810,5835 8810,5800
  region net VBUS: 8480,5600 8480,5690 8702,5690 8685,5663.75 8505,5663.75 8505,5600
  region net VBUS: 8675,5625 8675,5675 8680,5675 8700,5695 8700,5720 8690,5720 8680,5730 8630,5730 8630,5735 8640,5745 8695,5745 8710,5760 8710,5810 8750,5810 8750,5755 8720,5725 8720,5705 8690,5675 8690,5625
Layer 2 (plane layer: these items are gaps in the copper):
  lines w5: 8177.5,5702.5 7895,5985 7895,6340 7940,6385 7970,6415 7975,6415 8160,6415 8175,6400 8175,6390 8200,6365 8225,6340 8225,6220 8163.75,6158.75 8065,6060 8065,5965 8100,5930 8245,5785 8445,5785 8580,5785 8770,5975 ; 8675,5880 8670,5885 8610,5885 8565,5930 8565,6110 8705,6250 8925,6250 8945,6270 8945,6350 8955,6360 8990,6360 9020,6360 9030,6350 ; 8685,5890 8780,5985 8850,5985 8850,5780 8715,5645 8230,5645 8175,5700 7965,5700 7945,5680 7945,5595 7980,5560 8965,5560 9030,5625 9030,6350 ; 9030,6230 9030,6350

## Silkscreen, mask and mechanical layers (free items; w line width, h text height)
Top Overlay:
  text "Sarah Expansion Module Support" at 8840,6520 h30
  text "By Kwa / ft. Bernard / 1/22/2022" at 8820,5350 h40

## Text inside footprints (layer, text, board x,y; h text height)
P3: Top Overlay "2" at 8910,5635 h40 r90; Top Overlay "1" at 9010,5640 h40 r90; Top Overlay "15" at 9010,6470 h40 r90; Top Overlay "16" at 8910,6470 h40 r90